# EAGLE board humidity-v2.3.1 panelized (EAGLE 5.11)
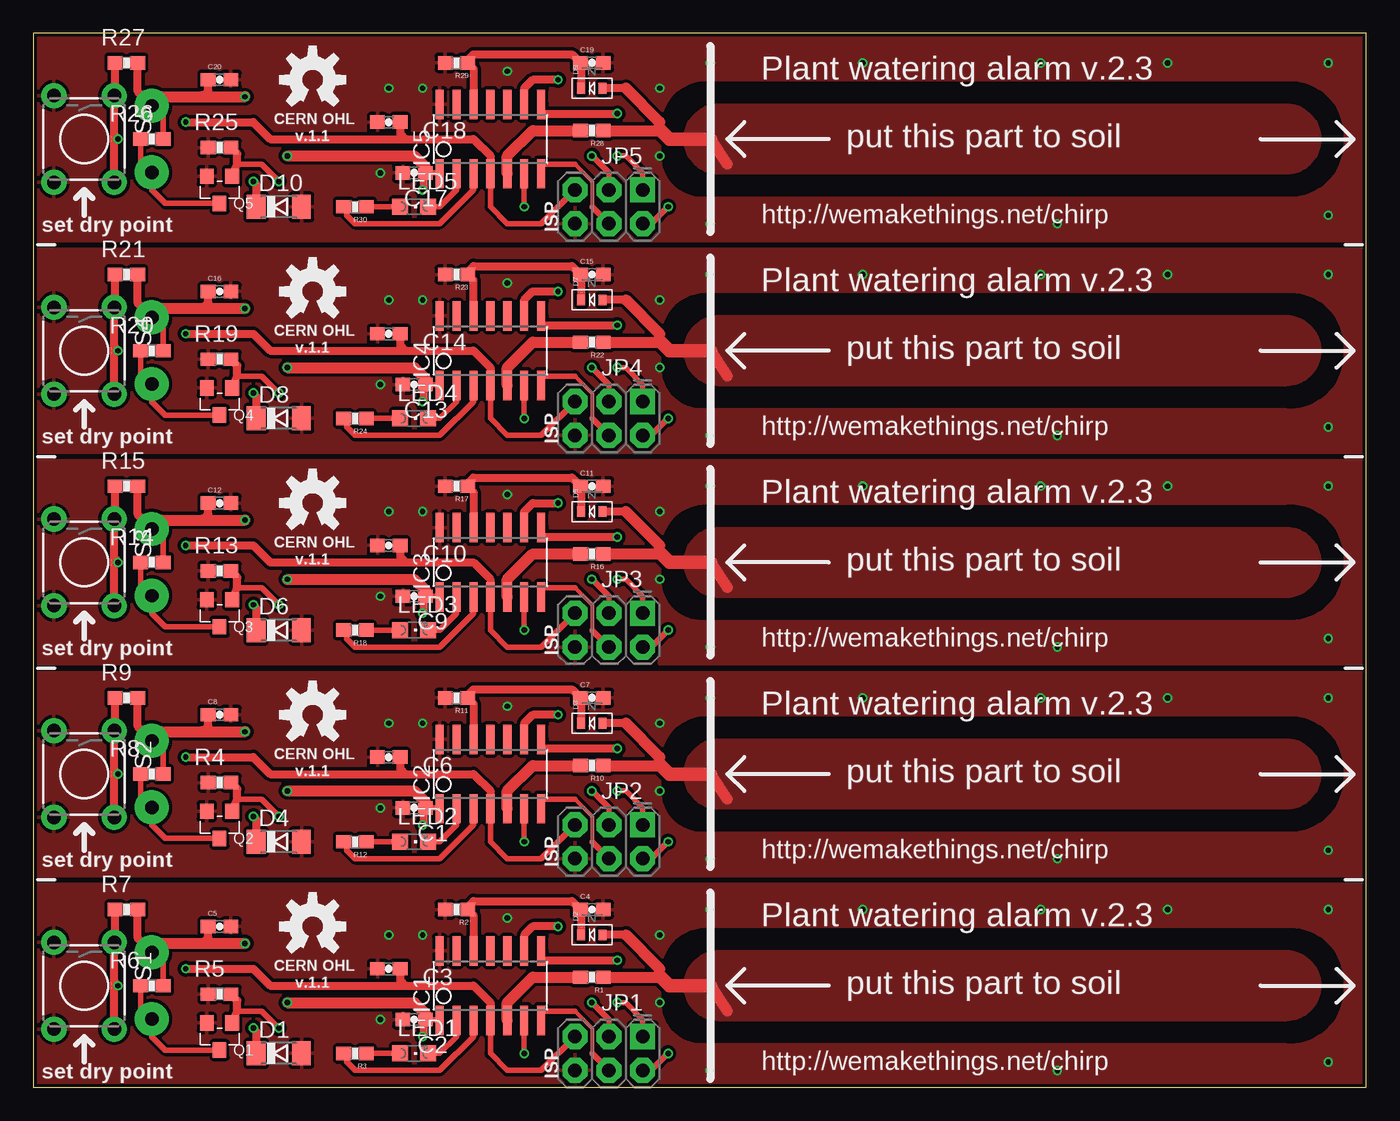
[diagram p0: board, top side]
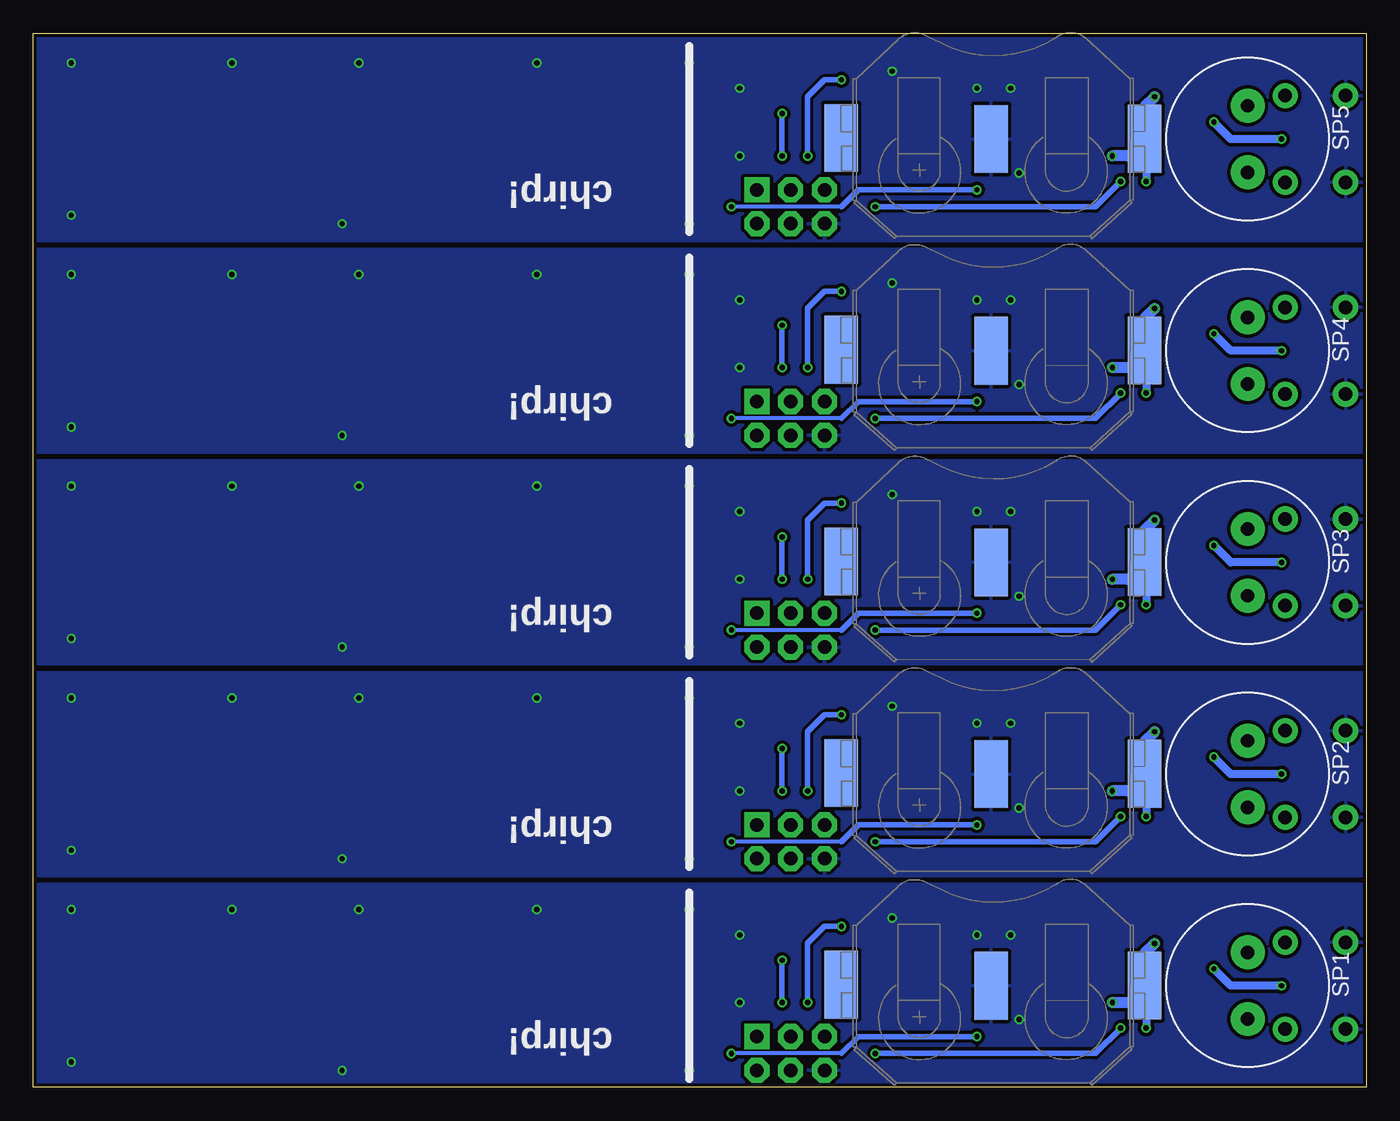
[diagram p1: board, bottom side, seen from below]

Size 100 x 79.05 mm. Coordinates in mm from the lower left corner, seen from the top.
Outline: 0,0 100,0 100,79.05 0,79.05 0,0
Copper layers (1*16): Top 0.035mm / dielectric 1.5mm / Bottom 0.035mm
Design rules "Fusion_eagle_rule_v1.1": minimum track width 6mil, minimum drill 12mil, track to track 6mil, track to pad 6mil, pad to pad 6mil, via to via 6mil, smd to smd 0mil, copper to edge 10mil, drill to drill 10mil, minimum pad ring 10mil, minimum via ring 6mil, stop-mask expansion 2mil, vias tented up to drill 100mil, thermal gap 10mil

## Footprints (pad centres in the part's own frame; a part is rotated, then mirrored left to right if it is on the bottom)
BAT-HLD-001 = smd 2.54 x 5.08: 1 -11.51,-0.02; 2 0,0; 3 11.25,-0.07
0603-CAP = smd 1.1 x 1: 1 -0.85,0; 2 0.85,0
SOD80C = smd 1.4 x 1.8: A 1.7,0; C -1.7,0
SOD-523 = smd 0.8 x 0.6: A 0,-0.8; K 0,0.8
SOIC14 = smd 0.61 x 2.21: 1 -3.81,-2.603; 2 -2.54,-2.603; 3 -1.27,-2.603; 4 0,-2.603; 5 1.27,-2.603; 6 2.54,-2.603; 7 3.81,-2.603; 8 3.81,2.603; 9 2.54,2.603; 10 1.27,2.603; 11 0,2.603; 12 -1.27,2.603; 13 -2.54,2.603; 14 -3.81,2.603
2X3-NS = drill 1.016 pad 1.88 square: 1 -2.54,-1.27 | drill 1.016 pad 1.88 octagon: 2 -2.54,1.27; 3 0,-1.27; 4 0,1.27; 5 2.54,-1.27; 6 2.54,1.27
CHIPLED_0805 = smd 1.2 x 1.2: A 0,-1.05; C 0,1.05
SOT23 = smd 1.016 x 1.143: 1 -0.95,-1.016; 2 0.95,-1.016; 3 0,1.016
0603-RES = smd 1.1 x 1: 1 -0.85,0; 2 0.85,0
TACTILE-PTH = drill 1.016 pad 1.88 round: 1 -3.251,2.261; 2 3.251,2.261; 3 -3.251,-2.261; 4 3.251,-2.261
PS12 = drill 1 pad 2.54 round: P$1 -2.5,0; P$2 2.5,0

## Placement (x,y rotation side)
B1  [BAT-HLD-001]  28.14,7.62 180 bottom
B2  [BAT-HLD-001]  28.14,23.5 180 bottom
B3  [BAT-HLD-001]  28.14,39.37 180 bottom
B4  [BAT-HLD-001]  28.14,55.24 180 bottom
B5  [BAT-HLD-001]  28.14,71.12 180 bottom
C1  100nF  [0603-CAP]  28.57,20.95 180 top
C2  100nF  [0603-CAP]  28.57,5.08 180 top
C3  100nF  [0603-CAP]  26.67,8.89 180 top
C4  1uF  [0603-CAP]  41.91,13.34 0 top
C5  1uF  [0603-CAP]  13.97,12.06 0 top
C6  100nF  [0603-CAP]  26.67,24.77 180 top
C7  1uF  [0603-CAP]  41.91,29.21 0 top
C8  1uF  [0603-CAP]  13.97,27.94 0 top
C9  100nF  [0603-CAP]  28.57,36.83 180 top
C10  100nF  [0603-CAP]  26.67,40.64 180 top
C11  1uF  [0603-CAP]  41.91,45.09 0 top
C12  1uF  [0603-CAP]  13.97,43.81 0 top
C13  100nF  [0603-CAP]  28.57,52.7 180 top
C14  100nF  [0603-CAP]  26.67,56.52 180 top
C15  1uF  [0603-CAP]  41.91,60.96 0 top
C16  1uF  [0603-CAP]  13.97,59.69 0 top
C17  100nF  [0603-CAP]  28.57,68.58 180 top
C18  100nF  [0603-CAP]  26.67,72.39 180 top
C19  1uF  [0603-CAP]  41.91,76.83 0 top
C20  1uF  [0603-CAP]  13.97,75.56 0 top
D1  [SOD80C]  18.41,2.54 0 top
D2  DIODE-SCHOTTKY_  [SOD-523]  41.91,11.43 90 top
D3  DIODE-SCHOTTKY_  [SOD-523]  41.91,27.3 90 top
D4  [SOD80C]  18.41,18.41 0 top
D5  DIODE-SCHOTTKY_  [SOD-523]  41.91,43.18 90 top
D6  [SOD80C]  18.41,34.29 0 top
D7  DIODE-SCHOTTKY_  [SOD-523]  41.91,59.05 90 top
D8  [SOD80C]  18.41,50.16 0 top
D9  DIODE-SCHOTTKY_  [SOD-523]  41.91,74.93 90 top
D10  [SOD80C]  18.41,66.04 0 top
IC1  TINY24/44/84-SSU  [SOIC14]  34.29,7.62 0 top
IC2  TINY24/44/84-SSU  [SOIC14]  34.29,23.5 0 top
IC3  TINY24/44/84-SSU  [SOIC14]  34.29,39.37 0 top
IC4  TINY24/44/84-SSU  [SOIC14]  34.29,55.24 0 top
IC5  TINY24/44/84-SSU  [SOIC14]  34.29,71.12 0 top
JP1  AVR_SPI_PRG_6NS  [2X3-NS]  43.18,2.54 180 top
JP2  AVR_SPI_PRG_6NS  [2X3-NS]  43.18,18.41 180 top
JP3  AVR_SPI_PRG_6NS  [2X3-NS]  43.18,34.29 180 top
JP4  AVR_SPI_PRG_6NS  [2X3-NS]  43.18,50.16 180 top
JP5  AVR_SPI_PRG_6NS  [2X3-NS]  43.18,66.04 180 top
LED1  [CHIPLED_0805]  28.57,2.54 270 top
LED2  [CHIPLED_0805]  28.57,18.41 270 top
LED3  [CHIPLED_0805]  28.57,34.29 270 top
LED4  [CHIPLED_0805]  28.57,50.16 270 top
LED5  [CHIPLED_0805]  28.57,66.04 270 top
Q1  [SOT23]  13.97,3.81 180 top
Q2  [SOT23]  13.97,19.68 180 top
Q3  [SOT23]  13.97,35.56 180 top
Q4  [SOT23]  13.97,51.44 180 top
Q5  [SOT23]  13.97,67.31 180 top
R1  10K  [0603-RES]  41.91,8.26 180 top
R2  510K  [0603-RES]  31.75,13.34 180 top
R3  100R  [0603-RES]  24.13,2.54 180 top
R4  10K  [0603-RES]  13.97,22.86 0 top
R5  10K  [0603-RES]  13.97,6.99 0 top
R6  1K  [0603-RES]  8.89,7.62 0 top
R7  10K  [0603-RES]  6.99,13.34 0 top
R8  1K  [0603-RES]  8.89,23.5 0 top
R9  10K  [0603-RES]  6.99,29.21 0 top
R10  10K  [0603-RES]  41.91,24.13 180 top
R11  510K  [0603-RES]  31.75,29.21 180 top
R12  100R  [0603-RES]  24.13,18.41 180 top
R13  10K  [0603-RES]  13.97,38.73 0 top
R14  1K  [0603-RES]  8.89,39.37 0 top
R15  10K  [0603-RES]  6.99,45.09 0 top
R16  10K  [0603-RES]  41.91,40.01 180 top
R17  510K  [0603-RES]  31.75,45.09 180 top
R18  100R  [0603-RES]  24.13,34.29 180 top
R19  10K  [0603-RES]  13.97,54.61 0 top
R20  1K  [0603-RES]  8.89,55.24 0 top
R21  10K  [0603-RES]  6.99,60.96 0 top
R22  10K  [0603-RES]  41.91,55.88 180 top
R23  510K  [0603-RES]  31.75,60.96 180 top
R24  100R  [0603-RES]  24.13,50.16 180 top
R25  10K  [0603-RES]  13.97,70.48 0 top
R26  1K  [0603-RES]  8.89,71.12 0 top
R27  10K  [0603-RES]  6.99,76.83 0 top
R28  10K  [0603-RES]  41.91,71.75 180 top
R29  510K  [0603-RES]  31.75,76.83 180 top
R30  100R  [0603-RES]  24.13,66.04 180 top
S1  [TACTILE-PTH]  3.81,7.62 270 top
S2  [TACTILE-PTH]  3.81,23.5 270 top
S3  [TACTILE-PTH]  3.81,39.37 270 top
S4  [TACTILE-PTH]  3.81,55.24 270 top
S5  [TACTILE-PTH]  3.81,71.12 270 top
SP1  SPEAKER/PS12  [PS12]  8.89,7.62 270 bottom
SP2  SPEAKER/PS12  [PS12]  8.89,23.5 270 bottom
SP3  SPEAKER/PS12  [PS12]  8.89,39.37 270 bottom
SP4  SPEAKER/PS12  [PS12]  8.89,55.24 270 bottom
SP5  SPEAKER/PS12  [PS12]  8.89,71.12 270 bottom

## Library data of the parts
B1-B5 C1-C20 JP1-JP5 R1-R30 S1-S5 = SparkFun
D1 D4 D6 D8 D10 = diode
D2 D3 D5 D7 D9 = microbuilder
IC1-IC5 = avr-5
LED1-LED5 SP1-SP5 = adafruit
Q1-Q5 = Seeed-Discrete

## Nets
BUZZER: IC1.6 Q1.1 R5.2
BUZZER1: IC2.6 Q2.1 R4.2
BUZZER2: IC3.6 Q3.1 R13.2
BUZZER3: IC4.6 Q4.1 R19.2
BUZZER4: IC5.6 Q5.1 R25.2
CAPACITANCE_V: C4.1 D2.K IC1.12 R2.1
CAPACITANCE_V1: C7.1 D3.K IC2.12 R11.1
CAPACITANCE_V2: C11.1 D5.K IC3.12 R17.1
CAPACITANCE_V3: C15.1 D7.K IC4.12 R23.1
CAPACITANCE_V4: C19.1 D9.K IC5.12 R29.1
CLK_OUT: IC1.5 R1.2
CLK_OUT1: IC2.5 R10.2
CLK_OUT2: IC3.5 R16.2
CLK_OUT3: IC4.5 R22.2
CLK_OUT4: IC5.5 R28.2
GND: B1.2 C2.2 C3.2 C4.2 C5.2 D1.A IC1.14 JP1.6 Q1.2 R2.2 R5.1 S1.3 S1.4
GND1: B2.2 C1.2 C6.2 C7.2 C8.2 D4.A IC2.14 JP2.6 Q2.2 R4.1 R11.2 S2.3 S2.4
GND2: B3.2 C9.2 C10.2 C11.2 C12.2 D6.A IC3.14 JP3.6 Q3.2 R13.1 R17.2 S3.3 S3.4
GND3: B4.2 C13.2 C14.2 C15.2 C16.2 D8.A IC4.14 JP4.6 Q4.2 R19.1 R23.2 S4.3 S4.4
GND4: B5.2 C17.2 C18.2 C19.2 C20.2 D10.A IC5.14 JP5.6 Q5.2 R25.1 R29.2 S5.3 S5.4
LED_A: IC1.3 R3.2
LED_A1: IC2.3 R12.2
LED_A2: IC3.3 R18.2
LED_A3: IC4.3 R24.2
LED_A4: IC5.3 R30.2
LED_K: IC1.2 LED1.C
LED_K1: IC2.2 LED2.C
LED_K2: IC3.2 LED3.C
LED_K3: IC4.2 LED4.C
LED_K4: IC5.2 LED5.C
MISO: IC1.8 JP1.1
MISO1: IC2.8 JP2.1
MISO2: IC3.8 JP3.1
MISO3: IC4.8 JP4.1
MISO4: IC5.8 JP5.1
MOSI: IC1.7 JP1.4
MOSI1: IC2.7 JP2.4
MOSI2: IC3.7 JP3.4
MOSI3: IC4.7 JP4.4
MOSI4: IC5.7 JP5.4
N$1: Q1.3 R6.1 SP1.P$2
N$2: LED1.A R3.1
N$3: Q2.3 R8.1 SP2.P$2
N$4: LED2.A R12.1
N$5: Q3.3 R14.1 SP3.P$2
N$6: LED3.A R18.1
N$7: Q4.3 R20.1 SP4.P$2
N$8: LED4.A R24.1
N$9: Q5.3 R26.1 SP5.P$2
N$10: LED5.A R30.1
RESET: C3.1 IC1.4 JP1.5 R7.1 S1.1 S1.2
RESET1: C6.1 IC2.4 JP2.5 R9.1 S2.1 S2.2
RESET2: C10.1 IC3.4 JP3.5 R15.1 S3.1 S3.2
RESET3: C14.1 IC4.4 JP4.5 R21.1 S4.1 S4.2
RESET4: C18.1 IC5.4 JP5.5 R27.1 S5.1 S5.2
SCK: IC1.9 JP1.3
SCK1: IC2.9 JP2.3
SCK2: IC3.9 JP3.3
SCK3: IC4.9 JP4.3
SCK4: IC5.9 JP5.3
V_CAP: D2.A R1.1
V_CAP1: D3.A R10.1
V_CAP2: D5.A R16.1
V_CAP3: D7.A R22.1
V_CAP4: D9.A R28.1
VCC: B1.1 C2.1 C5.1 D1.C IC1.1 JP1.2 R6.2 R7.2 SP1.P$1
VCC1: B2.1 C1.1 C8.1 D4.C IC2.1 JP2.2 R8.2 R9.2 SP2.P$1
VCC2: B3.1 C9.1 C12.1 D6.C IC3.1 JP3.2 R14.2 R15.2 SP3.P$1
VCC3: B4.1 C13.1 C16.1 D8.C IC4.1 JP4.2 R20.2 R21.2 SP4.P$1
VCC4: B5.1 C17.1 C20.1 D10.C IC5.1 JP5.2 R26.2 R27.2 SP5.P$1

## Tracks (layer width: path | path; a pad name or v marks a point on that pad's centre or on a via)
BUZZER  (via drill 0.4 pad 0.3)
  Top 0.406: v36.83,2.54 IC1.6 | v18.41,4.45 17.14,5.71 15.31,5.71
  Top 0.61: Q1.1 15.31,5.71 15.31,6.5 R5.2
  Bottom 0.406: v36.83,2.54 20.32,2.54 v18.41,4.45
BUZZER1  (via drill 0.4 pad 0.3)
  Top 0.406: v36.83,18.41 IC2.6 | v18.41,20.32 17.14,21.59 15.31,21.59
  Top 0.61: Q2.1 15.31,21.59 15.31,22.37 R4.2
  Bottom 0.406: v36.83,18.41 20.32,18.41 v18.41,20.32
BUZZER2  (via drill 0.4 pad 0.3)
  Top 0.406: v36.83,34.29 IC3.6 | v18.41,36.2 17.14,37.47 15.31,37.47
  Top 0.61: Q3.1 15.31,37.47 15.31,38.25 R13.2
  Bottom 0.406: v36.83,34.29 20.32,34.29 v18.41,36.2
BUZZER3  (via drill 0.4 pad 0.3)
  Top 0.406: v36.83,50.16 IC4.6 | v18.41,52.07 17.14,53.34 15.31,53.34
  Top 0.61: Q4.1 15.31,53.34 15.31,54.12 R19.2
  Bottom 0.406: v36.83,50.16 20.32,50.16 v18.41,52.07
BUZZER4  (via drill 0.4 pad 0.3)
  Top 0.406: v36.83,66.04 IC5.6 | v18.41,67.94 17.14,69.22 15.31,69.22
  Top 0.61: Q5.1 15.31,69.22 15.31,70 R25.2
  Bottom 0.406: v36.83,66.04 20.32,66.04 v18.41,67.94
CAPACITANCE_V
  Top 0.406: 33.02,12.91 R2.1 32.6,13.55
  Top 0.61: 33.02,12.91 IC1.12 | 32.6,13.55 33.02,13.97 40.4,13.97 C4.1 41.11,13.29 D2.K
CAPACITANCE_V1
  Top 0.406: 33.02,28.79 R11.1 32.6,29.43
  Top 0.61: 33.02,28.79 IC2.12 | 32.6,29.43 33.02,29.84 40.4,29.84 C7.1 41.11,29.16 D3.K
CAPACITANCE_V2
  Top 0.406: 33.02,44.66 R17.1 32.6,45.3
  Top 0.61: 33.02,44.66 IC3.12 | 32.6,45.3 33.02,45.72 40.4,45.72 C11.1 41.11,45.03 D5.K
CAPACITANCE_V3
  Top 0.406: 33.02,60.54 R23.1 32.6,61.17
  Top 0.61: IC4.12 33.02,60.54 | 32.6,61.17 33.02,61.59 40.4,61.59 C15.1 41.11,60.91 D7.K
CAPACITANCE_V4
  Top 0.406: 33.02,76.42 R29.1 32.6,77.05
  Top 0.61: 33.02,76.42 IC5.12 | 32.6,77.05 33.02,77.47 40.4,77.47 C19.1 41.11,76.78 D9.K
CLK_OUT
  Top 0.813: IC1.5 35.56,6.35 37.47,8.26 R1.2
CLK_OUT1
  Top 0.813: IC2.5 35.56,22.23 37.47,24.13 R10.2
CLK_OUT2
  Top 0.813: IC3.5 35.56,38.1 37.47,40.01 R16.2
CLK_OUT3
  Top 0.813: IC4.5 35.56,53.98 37.47,55.88 R22.2
CLK_OUT4
  Top 0.813: IC5.5 35.56,69.85 37.47,71.75 R28.2
GND  (via drill 0.4 pad 0.3)
  other vias: 26.67,11.43 29.21,11.43 26.04,5.08 46.99,6.35 35.56,12.7 46.99,11.43 50.8,13.34 62.23,13.34 75.56,13.34 85.09,13.34 97.16,13.34 97.16,1.91 76.83,1.27 50.8,1.27
  pour Top (isolate 0.254): 0,15.23 0,0 46.99,0 46.99,15.23
  pour Bottom (isolate 0.254): 0,15.23 100,15.23 100,0 0,0
  pour Top (isolate 0.254, no thermals): 46.99,15.23 100,15.23 100,0 46.99,0 46.99,6.35 arc90 50.16,3.17 93.98,3.17 arc90 98.42,6.99 98.42,8.26 arc90 93.98,12.06 50.8,12.06 arc90 46.99,8.89
GND1  (via drill 0.4 pad 0.3)
  other vias: 26.67,27.3 29.21,27.3 26.04,20.95 46.99,22.23 35.56,28.57 46.99,27.3 50.8,29.21 62.23,29.21 75.56,29.21 85.09,29.21 97.16,29.21 97.16,17.78 76.83,17.14 50.8,17.14
  pour Top (isolate 0.254): 0,31.11 0,15.88 46.99,15.88 46.99,31.11
  pour Bottom (isolate 0.254): 0,31.11 100,31.11 100,15.88 0,15.88
  pour Top (isolate 0.254, no thermals): 46.99,31.11 100,31.11 100,15.88 46.99,15.88 46.99,22.23 arc90 50.16,19.05 93.98,19.05 arc90 98.42,22.86 98.42,24.13 arc90 93.98,27.94 50.8,27.94 arc90 46.99,24.77
GND2  (via drill 0.4 pad 0.3)
  other vias: 26.67,43.18 29.21,43.18 26.04,36.83 46.99,38.1 35.56,44.45 46.99,43.18 50.8,45.09 62.23,45.09 75.56,45.09 85.09,45.09 97.16,45.09 97.16,33.66 76.83,33.02 50.8,33.02
  pour Top (isolate 0.254): 0,46.98 0,31.75 46.99,31.75 46.99,46.98
  pour Bottom (isolate 0.254): 0,46.98 100,46.98 100,31.75 0,31.75
  pour Top (isolate 0.254, no thermals): 46.99,46.98 100,46.98 100,31.75 46.99,31.75 46.99,38.1 arc90 50.16,34.92 93.98,34.92 arc90 98.42,38.73 98.42,40.01 arc90 93.98,43.81 50.8,43.81 arc90 46.99,40.64
GND3  (via drill 0.4 pad 0.3)
  other vias: 26.67,59.05 29.21,59.05 26.04,52.7 46.99,53.98 35.56,60.33 46.99,59.05 50.8,60.96 62.23,60.96 75.56,60.96 85.09,60.96 97.16,60.96 97.16,49.53 76.83,48.9 50.8,48.9
  pour Top (isolate 0.254): 0,62.85 0,47.62 46.99,47.62 46.99,62.85
  pour Bottom (isolate 0.254): 0,62.85 100,62.85 100,47.62 0,47.62
  pour Top (isolate 0.254, no thermals): 46.99,62.85 100,62.85 100,47.62 46.99,47.62 46.99,53.98 arc90 50.16,50.8 93.98,50.8 arc90 98.42,54.61 98.42,55.88 arc90 93.98,59.69 50.8,59.69 arc90 46.99,56.52
GND4  (via drill 0.4 pad 0.3)
  other vias: 26.67,74.93 29.21,74.93 26.04,68.58 46.99,69.85 35.56,76.2 46.99,74.93 50.8,76.83 62.23,76.83 75.56,76.83 85.09,76.83 97.16,76.83 97.16,65.41 76.83,64.77 50.8,64.77
  pour Top (isolate 0.254): 0,78.73 0,63.5 46.99,63.5 46.99,78.73
  pour Bottom (isolate 0.254): 0,78.73 100,78.73 100,63.5 0,63.5
  pour Top (isolate 0.254, no thermals): 46.99,78.73 100,78.73 100,63.5 46.99,63.5 46.99,69.85 arc90 50.16,66.67 93.98,66.67 arc90 98.42,70.48 98.42,71.75 arc90 93.98,75.56 50.8,75.56 arc90 46.99,72.39
LED_A
  Top 0.406: IC1.3 33.02,3.81 30.48,1.27 24.13,1.27 23.5,1.91 23.5,2.33 R3.2
LED_A1
  Top 0.406: IC2.3 33.02,19.68 30.48,17.14 24.13,17.14 23.5,17.78 23.5,18.2 R12.2
LED_A2
  Top 0.406: IC3.3 33.02,35.56 30.48,33.02 24.13,33.02 23.5,33.66 23.5,34.08 R18.2
LED_A3
  Top 0.406: IC4.3 33.02,51.44 30.48,48.9 24.13,48.9 23.5,49.53 23.5,49.95 R24.2
LED_A4
  Top 0.406: IC5.3 33.02,67.31 30.48,64.77 24.13,64.77 23.5,65.41 23.5,65.83 R30.2
LED_K
  Top 0.406: IC1.2 31.75,3.81 30.48,2.54 LED1.C
LED_K1
  Top 0.406: IC2.2 31.75,19.68 30.48,18.41 LED2.C
LED_K2
  Top 0.406: IC3.2 31.75,35.56 30.48,34.29 LED3.C
LED_K3
  Top 0.406: IC4.2 31.75,51.44 30.48,50.16 LED4.C
LED_K4
  Top 0.406: IC5.2 31.75,67.31 30.48,66.04 LED5.C
MISO  (via drill 0.4 pad 0.3)
  Top 0.406: JP1.1 45.72,5.08 44.45,6.35 v43.81,6.35 | IC1.8 38.16,10.16
  Top 0.61: v43.81,9.53 38.1,9.53 IC1.8
  Bottom 0.406: v43.81,9.53 v43.81,6.35
MISO1  (via drill 0.4 pad 0.3)
  Top 0.406: JP2.1 45.72,20.95 44.45,22.23 v43.81,22.23 | IC2.8 38.16,26.04
  Top 0.61: v43.81,25.4 38.1,25.4 IC2.8
  Bottom 0.406: v43.81,22.23 v43.81,25.4
MISO2  (via drill 0.4 pad 0.3)
  Top 0.406: JP3.1 45.72,36.83 44.45,38.1 v43.81,38.1 | IC3.8 38.16,41.91
  Top 0.61: v43.81,41.27 38.1,41.27 IC3.8
  Bottom 0.406: v43.81,41.27 v43.81,38.1
MISO3  (via drill 0.4 pad 0.3)
  Top 0.406: JP4.1 45.72,52.7 44.45,53.98 v43.81,53.98 | IC4.8 38.16,57.78
  Top 0.61: v43.81,57.15 38.1,57.15 IC4.8
  Bottom 0.406: v43.81,57.15 v43.81,53.98
MISO4  (via drill 0.4 pad 0.3)
  Top 0.406: JP5.1 45.72,68.58 44.45,69.85 v43.81,69.85 | IC5.8 38.16,73.66
  Top 0.61: v43.81,73.03 38.1,73.03 IC5.8
  Bottom 0.406: v43.81,73.03 v43.81,69.85
MOSI
  Top 0.305: 41.91,2.54 41.91,4.45 40.64,5.71
  Top 0.406: 41.91,2.54 JP1.4 | 40.64,5.71 38.16,5.71 IC1.7
MOSI1
  Top 0.305: 41.91,18.41 41.91,20.32 40.64,21.59
  Top 0.406: 41.91,18.41 JP2.4 | 40.64,21.59 38.16,21.59 IC2.7
MOSI2
  Top 0.305: 41.91,34.29 41.91,36.2 40.64,37.47
  Top 0.406: 41.91,34.29 JP3.4 | 40.64,37.47 38.16,37.47 IC3.7
MOSI3
  Top 0.305: 41.91,50.16 41.91,52.07 40.64,53.34
  Top 0.406: 41.91,50.16 JP4.4 | 40.64,53.34 38.16,53.34 IC4.7
MOSI4
  Top 0.305: 41.91,66.04 41.91,67.94 40.64,69.22
  Top 0.406: 41.91,66.04 JP5.4 | 40.64,69.22 38.16,69.22 IC5.7
N$1
  Top 0.406: Q1.3 9.91,2.79 8.89,3.81 SP1.P$2 8.04,5.97 R6.1
N$2
  Top 0.406: R3.1 LED1.A
N$3
  Top 0.406: Q2.3 9.91,18.67 8.89,19.68 SP2.P$2 8.04,21.84 R8.1
N$4
  Top 0.406: R12.1 LED2.A
N$5
  Top 0.406: Q3.3 9.91,34.54 8.89,35.56 SP3.P$2 8.04,37.72 R14.1
N$6
  Top 0.406: R18.1 LED3.A
N$7
  Top 0.406: Q4.3 9.91,50.42 8.89,51.44 SP4.P$2 8.04,53.59 R20.1
N$8
  Top 0.406: R24.1 LED4.A
N$9
  Top 0.406: Q5.3 9.91,66.29 8.89,67.31 SP5.P$2 8.04,69.47 R26.1
N$10
  Top 0.406: R30.1 LED5.A
RESET  (via drill 0.4 pad 0.3)
  Top 0.406: JP1.5 38.1,1.27 35.56,1.27 34.29,2.54 IC1.4 | S1.2 6.11,4.33 | S1.1 6.13,10.94
  Top 0.61: S1.1 S1.2 6.07,7.98 v6.35,7.62 | v11.43,8.89 16.51,8.89 17.78,7.62 27.94,7.62 | 27.94,7.62 33.02,7.62 34.29,6.35 IC1.4 | 6.13,10.94 R7.1 | C3.1 27.55,8.02 27.94,7.62
  Bottom 0.61: v6.35,7.62 10.16,7.62 v11.43,8.89
RESET1  (via drill 0.4 pad 0.3)
  Top 0.406: JP2.5 38.1,17.14 35.56,17.14 34.29,18.41 IC2.4 | S2.2 6.11,20.2 | S2.1 6.13,26.81
  Top 0.61: S2.1 S2.2 6.07,23.85 v6.35,23.5 | v11.43,24.77 16.51,24.77 17.78,23.5 27.94,23.5 | 27.94,23.5 33.02,23.5 34.29,22.23 IC2.4 | 6.13,26.81 R9.1 | C6.1 27.55,23.89 27.94,23.5
  Bottom 0.61: v6.35,23.5 10.16,23.5 v11.43,24.77
RESET2  (via drill 0.4 pad 0.3)
  Top 0.406: JP3.5 38.1,33.02 35.56,33.02 34.29,34.29 IC3.4 | S3.2 6.11,36.08 | S3.1 6.13,42.69
  Top 0.61: S3.1 S3.2 6.07,39.73 v6.35,39.37 | v11.43,40.64 16.51,40.64 17.78,39.37 27.94,39.37 | 27.94,39.37 33.02,39.37 34.29,38.1 IC3.4 | 6.13,42.69 R15.1 | C10.1 27.55,39.77 27.94,39.37
  Bottom 0.61: v6.35,39.37 10.16,39.37 v11.43,40.64
RESET3  (via drill 0.4 pad 0.3)
  Top 0.406: JP4.5 38.1,48.9 35.56,48.9 34.29,50.16 IC4.4 | S4.2 6.11,51.95 | S4.1 6.13,58.56
  Top 0.61: S4.1 S4.2 6.07,55.6 v6.35,55.24 | v11.43,56.52 16.51,56.52 17.78,55.24 27.94,55.24 | 27.94,55.24 33.02,55.24 34.29,53.98 IC4.4 | 6.13,58.56 R21.1 | C14.1 27.55,55.64 27.94,55.24
  Bottom 0.61: v6.35,55.24 10.16,55.24 v11.43,56.52
RESET4  (via drill 0.4 pad 0.3)
  Top 0.406: JP5.5 38.1,64.77 35.56,64.77 34.29,66.04 IC5.4 | S5.2 6.11,67.83 | S5.1 6.13,74.44
  Top 0.61: S5.1 S5.2 6.07,71.48 v6.35,71.12 | v11.43,72.39 16.51,72.39 17.78,71.12 27.94,71.12 | 27.94,71.12 33.02,71.12 34.29,69.85 IC5.4 | 6.13,74.44 R27.1 | C18.1 27.55,71.52 27.94,71.12
  Bottom 0.61: v6.35,71.12 10.16,71.12 v11.43,72.39
SCK  (via drill 0.4 pad 0.3)
  Top 0.406: JP1.3 43.18,5.08 v41.91,6.35
  Top 0.61: v39.37,12.06 37.47,12.06 36.83,11.43 IC1.9
  Bottom 0.406: v41.91,6.35 41.91,10.79 40.64,12.06 v39.37,12.06
SCK1  (via drill 0.4 pad 0.3)
  Top 0.406: JP2.3 43.18,20.95 v41.91,22.23
  Top 0.61: v39.37,27.94 37.47,27.94 36.83,27.3 IC2.9
  Bottom 0.406: v41.91,22.23 41.91,26.67 40.64,27.94 v39.37,27.94
SCK2  (via drill 0.4 pad 0.3)
  Top 0.406: JP3.3 43.18,36.83 v41.91,38.1
  Top 0.61: v39.37,43.81 37.47,43.81 36.83,43.18 IC3.9
  Bottom 0.406: v41.91,38.1 41.91,42.55 40.64,43.81 v39.37,43.81
SCK3  (via drill 0.4 pad 0.3)
  Top 0.406: JP4.3 43.18,52.7 v41.91,53.98
  Top 0.61: v39.37,59.69 37.47,59.69 36.83,59.05 IC4.9
  Bottom 0.406: v41.91,53.98 41.91,58.42 40.64,59.69 v39.37,59.69
SCK4  (via drill 0.4 pad 0.3)
  Top 0.406: JP5.3 43.18,68.58 v41.91,69.85
  Top 0.61: v39.37,75.56 37.47,75.56 36.83,74.93 IC5.9
  Bottom 0.406: v41.91,69.85 41.91,74.3 40.64,75.56 v39.37,75.56
V_CAP
  Top 0.61: 44.45,11.43 D2.A
  Top 0.813: 50.8,7.62 52.05,5.74 | R1.1 46.99,8.26 | 46.99,8.26 47.11,8.26 | 46.99,8.26 46.99,8.89 44.45,11.43
  Top 1.016: 50.8,7.62 47.74,7.62 47.11,8.26
  pour Top (no thermals): 48.9,7.62 arc-90 51.44,10.16 93.98,10.16 arc-90 96.52,7.62 arc-90 93.98,5.08 51.44,5.08 arc-90
V_CAP1
  Top 0.61: 44.45,27.3 D3.A
  Top 0.813: 50.8,23.5 52.05,21.61 | R10.1 46.99,24.13 | 46.99,24.13 47.11,24.13 | 46.99,24.13 46.99,24.77 44.45,27.3
  Top 1.016: 50.8,23.5 47.74,23.5 47.11,24.13
  pour Top (no thermals): 48.9,23.5 arc-90 51.44,26.04 93.98,26.04 arc-90 96.52,23.5 arc-90 93.98,20.95 51.44,20.95 arc-90
V_CAP2
  Top 0.61: 44.45,43.18 D5.A
  Top 0.813: 50.8,39.37 52.05,37.49 | R16.1 46.99,40.01 | 46.99,40.01 47.11,40.01 | 46.99,40.01 46.99,40.64 44.45,43.18
  Top 1.016: 50.8,39.37 47.74,39.37 47.11,40.01
  pour Top (no thermals): 48.9,39.37 arc-90 51.44,41.91 93.98,41.91 arc-90 96.52,39.37 arc-90 93.98,36.83 51.44,36.83 arc-90
V_CAP3
  Top 0.61: 44.45,59.05 D7.A
  Top 0.813: 50.8,55.24 52.05,53.36 | R22.1 46.99,55.88 | 46.99,55.88 47.11,55.88 | 46.99,55.88 46.99,56.52 44.45,59.05
  Top 1.016: 50.8,55.24 47.74,55.24 47.11,55.88
  pour Top (no thermals): 48.9,55.24 arc-90 51.44,57.78 93.98,57.78 arc-90 96.52,55.24 arc-90 93.98,52.7 51.44,52.7 arc-90
V_CAP4
  Top 0.61: 44.45,74.93 D9.A
  Top 0.813: 50.8,71.12 52.05,69.24 | R28.1 46.99,71.75 | 46.99,71.75 47.11,71.75 | 46.99,71.75 46.99,72.39 44.45,74.93
  Top 1.016: 50.8,71.12 47.74,71.12 47.11,71.75
  pour Top (no thermals): 48.9,71.12 arc-90 51.44,73.66 93.98,73.66 arc-90 96.52,71.12 arc-90 93.98,68.58 51.44,68.58 arc-90
VCC  (via drill 0.4 pad 0.3)  (1 unrouted)
  Top 0.406: JP1.2 46.35,1.27 v47.62,2.54 | 29.27,3.81 v29.21,3.81 | C2.1 30.42,5.08 | R6.2 9.74,9.27 SP1.P$1
  Top 0.61: 29.27,3.81 29.27,4.93 C2.1 | C5.1 13.12,11.21 12.7,10.79 | R7.2 7.83,11.18 SP1.P$1 | D1.C 16.71,4.24 v16.51,4.45
  Top 0.813: v15.88,10.79 12.7,10.79 9.56,10.79 SP1.P$1 | C2.1 29.45,5.47 28.57,6.35 v19.05,6.35
  Bottom 0.305: 39.37,2.54 v47.62,2.54
  Bottom 0.406: 39.37,2.54 38.1,3.81 v29.21,3.81 | B1.1 17.92,6.35
  Bottom 0.61: 16.63,10.04 B1.1 16.51,7.52 v16.51,4.45
  Bottom 0.813: v15.88,10.79 16.63,10.04 | 17.92,6.35 v19.05,6.35
VCC1  (via drill 0.4 pad 0.3)  (1 unrouted)
  Top 0.406: JP2.2 46.35,17.14 v47.62,18.41 | 29.27,19.68 v29.21,19.68 | C1.1 30.42,20.95 | R8.2 9.74,25.14 SP2.P$1
  Top 0.61: 29.27,19.68 29.27,20.8 C1.1 | C8.1 13.12,27.09 12.7,26.67 | R9.2 7.83,27.05 SP2.P$1 | D4.C 16.71,20.11 v16.51,20.32
  Top 0.813: v15.88,26.67 12.7,26.67 9.56,26.67 SP2.P$1 | C1.1 29.45,21.35 28.57,22.23 v19.05,22.23
  Bottom 0.305: 39.37,18.41 v47.62,18.41
  Bottom 0.406: 39.37,18.41 38.1,19.68 v29.21,19.68 | B2.1 17.92,22.23
  Bottom 0.61: 16.63,25.91 B2.1 16.51,23.39 v16.51,20.32
  Bottom 0.813: v15.88,26.67 16.63,25.91 | 17.92,22.23 v19.05,22.23
VCC2  (via drill 0.4 pad 0.3)  (1 unrouted)
  Top 0.406: JP3.2 46.35,33.02 v47.62,34.29 | 29.27,35.56 v29.21,35.56 | C9.1 30.42,36.83 | R14.2 9.74,41.02 SP3.P$1
  Top 0.61: 29.27,35.56 29.27,36.68 C9.1 | C12.1 13.12,42.97 12.7,42.55 | R15.2 7.83,42.92 SP3.P$1 | D6.C 16.71,35.99 v16.51,36.2
  Top 0.813: v15.88,42.55 12.7,42.55 9.56,42.55 SP3.P$1 | C9.1 29.45,37.23 28.57,38.1 v19.05,38.1
  Bottom 0.305: 39.37,34.29 v47.62,34.29
  Bottom 0.406: 39.37,34.29 38.1,35.56 v29.21,35.56 | B3.1 17.92,38.1
  Bottom 0.61: 16.63,41.79 B3.1 16.51,39.27 v16.51,36.2
  Bottom 0.813: v15.88,42.55 16.63,41.79 | 17.92,38.1 v19.05,38.1
VCC3  (via drill 0.4 pad 0.3)  (1 unrouted)
  Top 0.406: JP4.2 46.35,48.9 v47.62,50.16 | 29.27,51.44 v29.21,51.44 | C13.1 30.42,52.7 | R20.2 9.74,56.9 SP4.P$1
  Top 0.61: 29.27,51.44 29.27,52.55 C13.1 | C16.1 13.12,58.84 12.7,58.42 | R21.2 7.83,58.8 SP4.P$1 | D8.C 16.71,51.87 v16.51,52.07
  Top 0.813: v15.88,58.42 12.7,58.42 9.56,58.42 SP4.P$1 | C13.1 29.45,53.1 28.57,53.98 v19.05,53.98
  Bottom 0.305: 39.37,50.16 v47.62,50.16
  Bottom 0.406: 39.37,50.16 38.1,51.44 v29.21,51.44 | B4.1 17.92,53.98
  Bottom 0.61: 16.63,57.66 B4.1 16.51,55.15 v16.51,52.07
  Bottom 0.813: v15.88,58.42 16.63,57.66 | 17.92,53.98 v19.05,53.98
VCC4  (via drill 0.4 pad 0.3)  (1 unrouted)
  Top 0.406: JP5.2 46.35,64.77 v47.62,66.04 | 29.27,67.31 v29.21,67.31 | C17.1 30.42,68.58 | R26.2 9.74,72.77 SP5.P$1
  Top 0.61: 29.27,67.31 29.27,68.43 C17.1 | C20.1 13.12,74.72 12.7,74.3 | R27.2 7.83,74.67 SP5.P$1 | D10.C 16.71,67.74 v16.51,67.94
  Top 0.813: v15.88,74.3 12.7,74.3 9.56,74.3 SP5.P$1 | C17.1 29.45,68.97 28.57,69.85 v19.05,69.85
  Bottom 0.305: 39.37,66.04 v47.62,66.04
  Bottom 0.406: 39.37,66.04 38.1,67.31 v29.21,67.31 | B5.1 17.92,69.85
  Bottom 0.61: 16.63,73.54 B5.1 16.51,71.02 v16.51,67.94
  Bottom 0.813: v15.88,74.3 16.63,73.54 | 17.92,69.85 v19.05,69.85

## Text on the board
_tsilk: Plant watering alarm v.2.3 | CERN OHL | v.1.1 | put this part to soil | http://wemakethings.net/chirp | set dry point | ISP | Plant watering alarm v.2.3 | CERN OHL | v.1.1 | put this part to soil | http://wemakethings.net/chirp | set dry point | ISP | Plant watering alarm v.2.3 | CERN OHL | v.1.1 | put this part to soil | http://wemakethings.net/chirp | set dry point | ISP | Plant watering alarm v.2.3 | CERN OHL | v.1.1 | put this part to soil | set dry point | ISP | http://wemakethings.net/chirp | Plant watering alarm v.2.3 | CERN OHL | v.1.1 | put this part to soil | set dry point | ISP | http://wemakethings.net/chirp
_bsilk: chirp! | chirp! | chirp! | chirp! | chirp!